# Altium PCB 本部自动化2003交通信号灯设计.PcbDoc
Units mm, origin at the board's own origin, x right, y up, seen from the top; angles counter-clockwise.
Board outline 200 x 150 mm, 2 copper layers (Top Layer, Bottom Layer); 30 components, 53 nets, 203 pads, 4 vias.
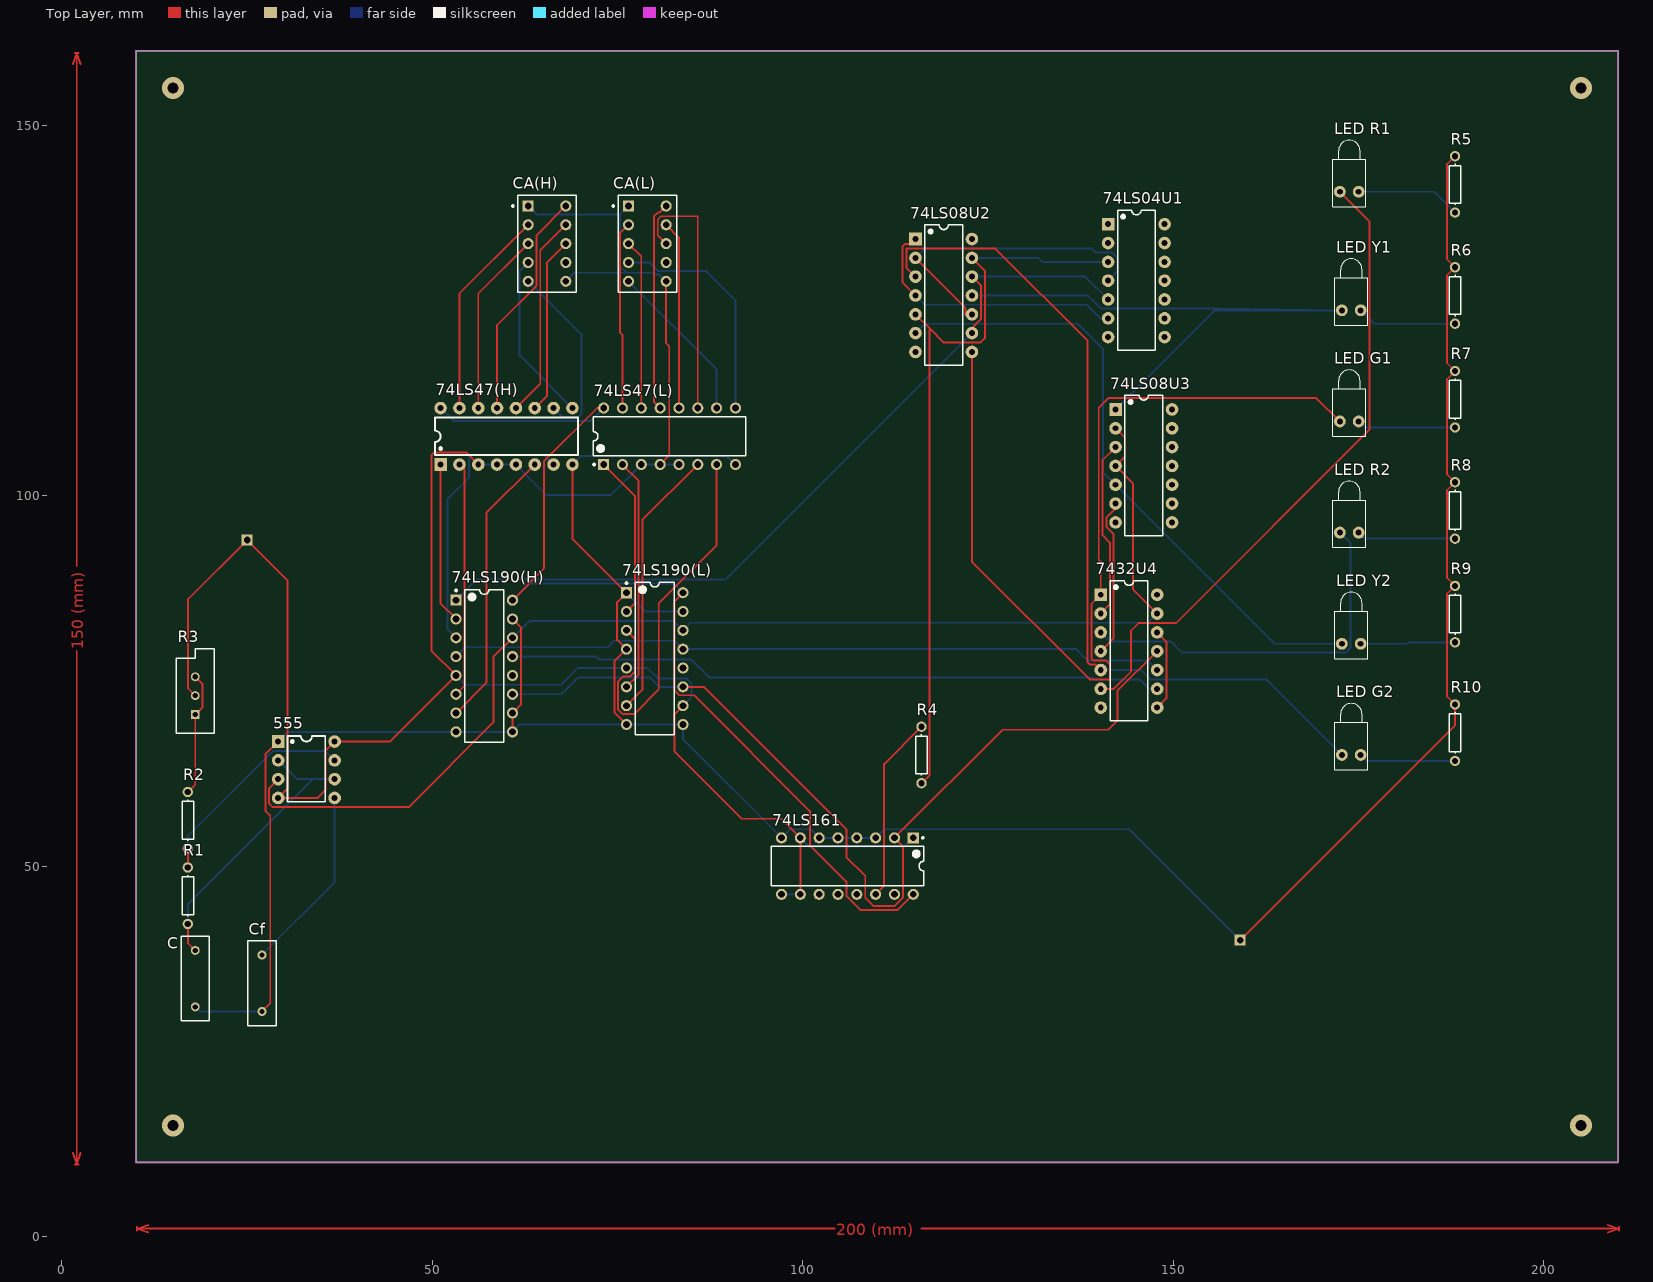
[diagram p0: Top Layer view]
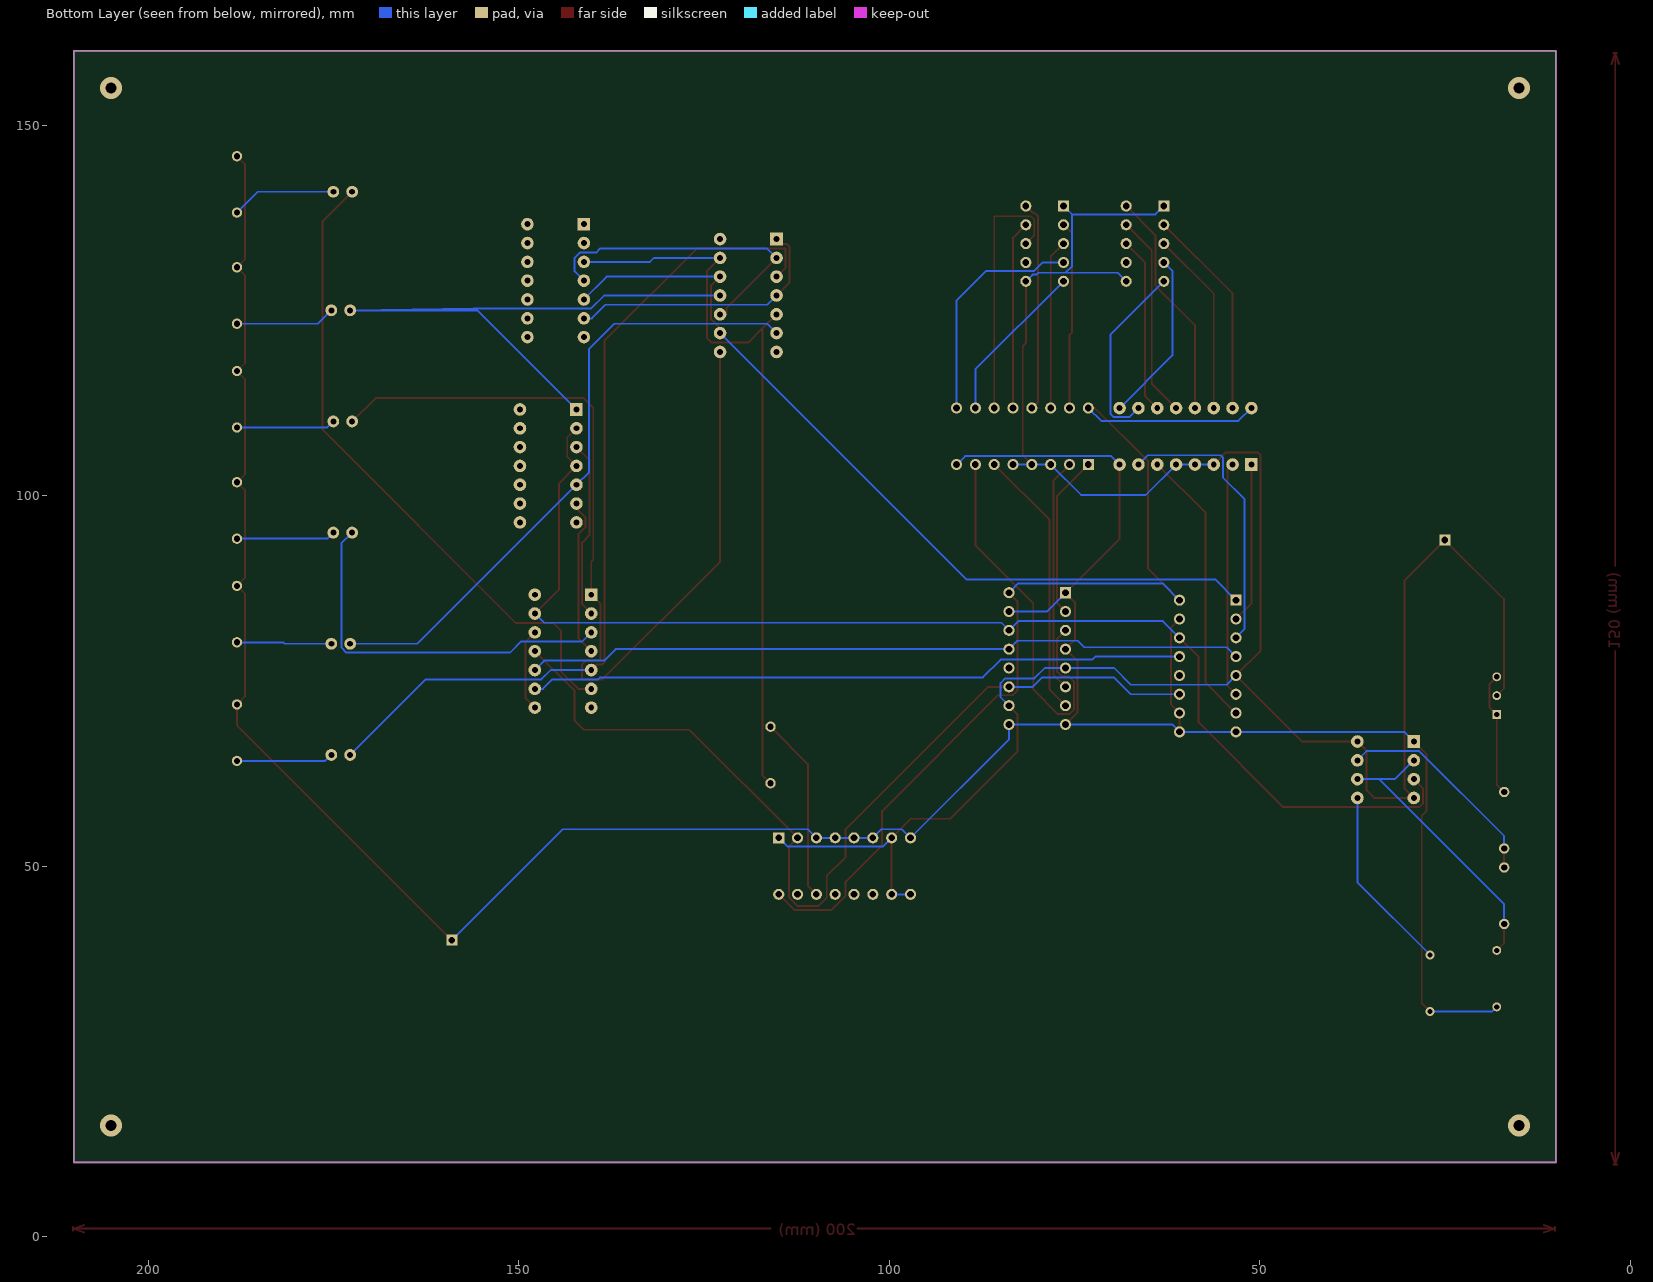
[diagram p1: Bottom Layer view, seen from below]

## Layer stack, top to bottom
Top Solder: solder mask 0.0102, Solder Resist, Dk 3.5
Top Layer: signal copper 0.0356
Dielectric 1: dielectric 0.32, FR-4, Dk 4.8
Bottom Layer: signal copper 0.0356
Bottom Solder: solder mask 0.0102, Solder Resist, Dk 3.5

## Board outline
10,10 210,10 210,160 10,160

## Design rules (kind name [scope] priority, off if disabled: settings)
Clearance [All] p1: gap=0.254 ignorepadtopadclearanceinfootprint=FALSE except(0: Arc-Hole Track-Hole SMDPad-Hole THPad-Hole Via-Hole Fill-Hole Poly-Hole Region-Hole Text-Hole)
PolygonConnect [All] p1: connectstyle=Relief reliefconductorwidth=0.254 reliefentries=4 polygonreliefangle="90 Angle" airgapwidth=0.254
RoutingVias [All] p1: holewidth=0.711 width=1.27 viastyle="Through Hole" minholewidth=0.711 minwidth=1.27 maxholewidth=0.711 maxwidth=1.27
SolderMaskExpansion [All] p1: expansion=0.102 istentingtop=FALSE
Width [All] p1: maxlimit=0.254 minlimit=0.254 preferedwidth=0.254
30 further rules are at their usual default settings.

## Components (designator, comment, footprint, x,y, rotation, side; value= is the part's Value field where it differs from the comment)
74LS04U1 "74LS04" DIP14 145,129 r0 top
74LS08U2 "74LS08" DIP14 119,127 r0 top
74LS08U3 "74LS08" DIP14 146,104 r0 top
74LS47(H) "SN7447A" DIP16 60,108 r90 top
74LS47(L) "SN7447A" DIP-16 82,108 r90 top
74LS161 "74LS161A" DIP-16 106,50 r270 top
74LS190(H) "SN74LS190" DIP-16 57,77 r0 top
74LS190(L) "SN74LS190" DIP-16 80,78 r0 top
555 "555" DIP8 33,63 r0 top
7432U4 "7432" DIP14 144,79 r0 top
C "Cap" RAD-0.3 18,34.81 r90 top value=10uF
CA(H) "Dpy Red-CA" A 65.46,134 r0 top
CA(L) "Dpy Red-CA" A 79,134 r0 top
Cf "Cap" RAD-0.3 27,34.19 r90 top value=10nF
"LED G1" "LED1" LED-1 173.73,110 r90 top
"LED G2" "LED1" LED-1 174,65 r90 top
"LED R1" "LED1" LED-1 173.73,141 r90 top
"LED R2" "LED1" LED-1 173.73,95 r90 top
"LED Y1" "LED1" LED-1 174,125 r90 top
"LED Y2" "LED1" LED-1 174,80 r90 top
R1 "Res1" AXIAL-0.3 17,46 r90 top value=51K
R2 "Res1" AXIAL-0.3 17,56.19 r90 top value=47K
R3 "RPot" VR5 18,73 r90 top value=5K
R4 "Res1" AXIAL-0.3 116,65 r90 top value=100
R5 "Res1" AXIAL-0.3 188,142 r90 top value=100
R6 "Res1" AXIAL-0.3 188,127 r90 top value=100
R7 "Res1" AXIAL-0.3 188,113 r90 top value=100
R8 "Res1" AXIAL-0.3 188,98 r90 top value=100
R9 "Res1" AXIAL-0.3 188,84 r90 top value=100
R10 "Res1" AXIAL-0.3 188,68 r90 top value=100

## Footprints (in the part's own frame and the unit in brackets; to place one, negate y for a bottom-side part, rotate by r counter-clockwise, add the part's x,y. Pads: shape width x height; smd on the part's side, far side on the other; paste and mask are expansions set on the pad)
A [mm] "LED, 7-Segment Display, 7.62 mm, RHD; 10 Leads; Row Space 5.08 mm; Pitch 2.54 mm"
  rect 1.5x1.5 hole 0.9: 1(-2.54,5.08)
  round 1.5 hole 0.9: 2(-2.54,2.54) 3(-2.54,0) 4(-2.54,-2.54) 5(-2.54,-5.08) 6(2.54,-5.08) 7(2.54,-2.54) 8(2.54,0) 9(2.54,2.54) 10(2.54,5.08)
  silkscreen extent -4.72,-6.55 3.95,6.55, body extent -3.95,-6.55 3.95,6.55, height 6.34
AXIAL-0.3 [mm] "Axial Device, Thru-Hole; 2 Leads; 0.3 in Pin Spacing"
  round 1.4 hole 0.85: 1(-3.81,0) 2(3.81,0)
  silkscreen extent -2.77,-0.76 2.77,0.76
DIP8 [mm]
  rect 1.7x1.7 hole 0.8: 1(-3.81,3.81)
  round 1.7 hole 0.8: 2(-3.81,1.27) 3(-3.81,-1.27) 4(-3.81,-3.81) 5(3.81,-3.81) 6(3.81,-1.27) 7(3.81,1.27) 8(3.81,3.81)
  silkscreen extent -2.54,-4.32 2.54,4.57, body extent -3.94,-4.7 3.91,4.7, height 4.5
DIP14 [mm]
  rect 1.7x1.7 hole 0.8: 1(-3.81,7.62)
  round 1.7 hole 0.8: 2(-3.81,5.08) 3(-3.81,2.54) 4(-3.81,0) 5(-3.81,-2.54) 6(-3.81,-5.08) 7(-3.81,-7.62) 8(3.81,-7.62) 9(3.81,-5.08) 10(3.81,-2.54) 11(3.81,0) 12(3.81,2.54) 13(3.81,5.08) 14(3.81,7.62)
  silkscreen extent -2.54,-9.4 2.54,9.53, body extent -3.98,-9.6 3.98,9.4, height 4.1
DIP16 [mm]
  rect 1.7x1.7 hole 0.8: 1(-3.81,8.89)
  round 1.7 hole 0.8: 2(-3.81,6.35) 3(-3.81,3.81) 4(-3.81,1.27) 5(-3.81,-1.27) 6(-3.81,-3.81) 7(-3.81,-6.35) 8(-3.81,-8.89) 9(3.81,-8.89) 10(3.81,-6.35) 11(3.81,-3.81) 12(3.81,-1.27) 13(3.81,1.27) 14(3.81,3.81) 15(3.81,6.35) 16(3.81,8.89)
  silkscreen extent -2.54,-9.65 2.54,9.65, body extent -4.02,-9.65 4.02,9.65, height 4.45
DIP-16 [mm] "DIP; 16 Leads; Row Spacing 7.62 mm; Pitch 2.54 mm"
  rect 1.5x1.5 hole 0.9: 1(-3.81,8.89)
  round 1.5 hole 0.9: 2(-3.81,6.35) 3(-3.81,3.81) 4(-3.81,1.27) 5(-3.81,-1.27) 6(-3.81,-3.81) 7(-3.81,-6.35) 8(-3.81,-8.89) 9(3.81,-8.89) 10(3.81,-6.35) 11(3.81,-3.81) 12(3.81,-1.27) 13(3.81,1.27) 14(3.81,3.81) 15(3.81,6.35) 16(3.81,8.89)
  silkscreen extent -3.93,-10.3 2.65,10.31, body extent -3.6,-10.28 3.6,10.28, height 5.08
LED-1 [mm] "LED; 2 Leads"
  round 1.6 hole 0.8: 1(0,1.27) 2(0,-1.27)
  silkscreen extent -2,-2.2 6.95,2.2
RAD-0.3 [mm] "Radial Cap, Thru-Hole; 2 Leads; 0.3 in Pin Spacing"
  round 1.2 hole 0.7: 1(-3.81,0) 2(3.81,0)
  silkscreen extent -5.72,-1.91 5.71,1.9
VR5 [mm] "Thru-Hole; 3 Leads"
  rect 1.2x1.2 hole 0.7: 1(-2.54,0)
  round 1.2 hole 0.7: 2(0,0) 3(2.54,0)
  silkscreen extent -5.08,-2.54 6.35,2.54

## Part data
74LS47(H) 74LS47(L): library part SN7446A, "BCD-To-SEVEN-SEGMENT DEC DRV"
74LS161: "Synchronous 4-Bit Binary Counter with Direct Clear"
74LS190(H) 74LS190(L): "SYN UP/DOWN CNT DOWN/UP MODE CONTTOL"
C Cf: "Capacitor", LatestRevisionDate=17-Jul-2002, LatestRevisionNote="Re-released for DXP Platform.", PackageDescription="Radial Cap, Thru-Hole; 2 Leads; 0.3 in Pin Spacing", PackageReference=RAD-0.3, Published=8-Jun-2000, Publisher="Altium Limited"
CA(H) CA(L): "7.62 mm Black Surface HER 7-Segment Display: CA, RH DP", Colour="High Efficiency Red (HER)", ComponentLink1Description="Manufacturer Link", ComponentLink1URL=http://www.agilent.com/, DatasheetVersion=19-Feb-2002, LatestRevisionDate=17-Dec-2003, LatestRevisionNote="Schematic revised, PCB Footprint replaced.", MinimumIntensity="360 ucd", Note="IF = 5 mA", PackageDescription="LED, 7-Segment Display, 7.62 mm, RHD; 10 Leads; Row Space 5.08 mm; Pitch 2.54 mm", PackageReference=A, PackageVersion=11-Feb-2002, Published=8-Jun-2000, Publisher="Altium Limited"
"LED G1" "LED G2" "LED R1" "LED R2" "LED Y1" "LED Y2": "Typical RED GaAs LED", LatestRevisionDate=08-Jul-2005, LatestRevisionNote="Mech Layer 1 removed.", PackageDescription="LED; 2 Leads", PackageReference=LED-1, Published=8-Jun-2000, Publisher="Altium Limited"
R1 R2 R4 R5 R6 R7 R8 R9 R10: "Resistor", LatestRevisionDate=17-Jul-2002, LatestRevisionNote="Re-released for DXP Platform.", PackageDescription="Axial Device, Thru-Hole; 2 Leads; 0.3 in Pin Spacing", PackageReference=AXIAL-0.3, Published=8-Jun-2000, Publisher="Altium Limited"
R3: "Potentiometer", LatestRevisionDate=17-Jul-2002, LatestRevisionNote="Re-released for DXP Platform.", PackageDescription="Variable Resistor, Thru-Hole; 3 Leads", PackageReference=VR5, Published=8-Jun-2000, Publisher="Altium Limited", Set Position=0.5, Sim Note="Enter the Resistance value and the set point into parameter fields."

## Free pads (board coordinates)
  rect 1.5x1.5 hole 0.9: 13(25,94) 14(159,40)

## Via types
v1: diameter 3, hole 1.5, Top Layer to Bottom Layer, 4 vias

## Nets (pads, with @x,y where several pads share a name; then routed paths per layer and width w, separated by ;. In a path a pad name is that pad's centre, name@x,y a point inside that pad or via, vN(x,y) a via of type N, cw(c..) or ccw(c..) an arc to the next point about the centre after c; other vN are vias at no path point)
+5: 74LS47(H).3 74LS47(H).4 74LS47(H).5 74LS47(L).3 74LS47(L).4 74LS47(L).5 74LS161.1 74LS161.7 74LS161.9 74LS161.10 74LS190(H).5 74LS190(L).5 74LS190(L).10 555.4 555.8 CA(H).1 CA(H).6 CA(L).1 CA(L).6 pad.13 R3.2 | length 320
  Top Layer w0.254: R3.2 17.018,73.982 17.018,86.018 pad.13 30.429,88.571 30.429,60.429 555.4 34.544,59.19 35.56,60.206 35.56,65.56 555.8 44.27,66.81 53.19,75.73 49.86,79.06 49.86,105.41 50.267,105.816 54.564,105.816 56.19,104.19 ; 80.73,104.19 81.966,105.426 81.966,120.148 81.54,120.574 81.54,128.92 ; 83.81,71.65 82.677,70.517 82.677,65.43 91.719,56.388 97.072,56.388 74LS161.7 74LS161.10
  Bottom Layer w0.254: 53.19,75.73 54.447,74.473 67.364,74.473 69.621,76.73 76.19,76.73 78.972,76.73 80.381,75.321 84.328,75.321 84.963,74.686 84.963,72.803 83.81,71.65 ; 56.19,104.19 58.73,104.19 61.27,104.19 65.384,100.076 74.076,100.076 78.19,104.19 80.73,104.19 83.27,104.19 ; 62.92,139.08 64.053,137.947 75.311,137.931 ; 68,128.92 69.153,130.073 76.2,130.073 ; 76.46,139.08 75.311,137.931 ; 81.54,128.92 80.639,129.821 80.153,129.821 79.901,130.073 76.2,130.073 ; 74LS161.9 74LS161.10 ; 74LS161.7 100.806,52.654 113.734,52.654 74LS161.1 ; 75.311,137.931 75.311,130.962 76.2,130.073
GND: 74LS47(H).8 74LS47(L).8 74LS161.3 74LS161.4 74LS161.5 74LS161.6 74LS161.8 74LS190(H).8 74LS190(H).9 74LS190(H).10 74LS190(H).15 74LS190(L).1 74LS190(L).4 74LS190(L).8 74LS190(L).9 74LS190(L).15 555.1 C.1 Cf.1 pad.14 R5.2 R6.2 R7.2 R8.2 R9.2 R10.2 | length 403.7
  Top Layer w0.254: Cf.1 28.118,31.498 28.118,56.784 27.451,57.451 27.451,65.071 555.1 ; 60.81,68.11 60.81,70.65 61.951,71.791 61.951,82.209 60.81,83.35 ; 68.89,104.19 68.89,94.19 76.19,86.89 74.93,85.63 74.93,80.53 76.19,79.27 74.551,77.631 74.551,70.749 76.19,69.11 ; pad.14 188,69 R10.2 186.919,72.891 186.919,86.729 R9.2 186.919,88.891 186.919,100.729 R8.2 186.919,102.891 186.919,115.729 R7.2 186.919,117.891 186.919,129.729 R6.2 186.919,131.891 186.919,144.729 R5.2
  Bottom Layer w0.254: C.1 18.62,30.38 Cf.1 ; 555.1 30.49,68.11 53.19,68.11 60.81,68.11 61.81,69.11 76.19,69.11 83.81,69.11 83.81,67.11 74LS161.8 98.266,54.966 101.034,54.966 74LS161.6 74LS161.5 74LS161.4 74LS161.3 110.966,54.966 144.034,54.966 pad.14 ; 68.89,104.19 70.034,105.334 89.746,105.334 90.89,104.19 ; 76.19,86.89 78.73,84.35 83.81,84.35
Net74LS04U1_3: 74LS04U1.3 74LS08U2.5 74LS08U2.13 R4.1 | length 103.2
  Top Layer w0.254: 74LS08U2.5 117.094,122.556 ; R4.1 117.094,62.284 117.094,122.556 ; 74LS08U2.13 124.562,130.328 124.562,121.26 123.952,120.65 119,120.65 117.094,122.556
  Bottom Layer w0.254: 74LS08U2.13 131.724,132.08 132.264,131.54 74LS04U1.3
Net74LS04U1_4: 74LS04U1.4 74LS08U2.2 74LS08U2.10 | length 43.2
  Top Layer w0.254: 74LS08U2.2 121.92,125.35 121.92,124.46 74LS08U2.10
  Bottom Layer w0.254: 74LS08U2.2 116.435,133.325 139.014,133.325 139.548,132.791 141.732,132.791 142.443,132.08 142.443,130.253 74LS04U1.4
Net74LS04U1_5: 74LS04U1.5 74LS08U2.9 74LS08U2.12 74LS190(H).1 | length 112.8
  Top Layer w0.254: 74LS08U2.9 122.965,122.784 124.054,123.872 124.054,128.296 74LS08U2.12
  Bottom Layer w0.254: 53.19,85.89 55.997,88.697 89.587,88.697 74LS08U2.9 ; 74LS08U2.12 138.11,129.54 74LS04U1.5
Net74LS04U1_6: 74LS04U1.6 74LS08U2.1 74LS08U2.4 | length 36.8
  Top Layer w0.254: 74LS08U2.4 113.451,128.739 113.451,133.631 113.792,133.972 114.542,133.972 74LS08U2.1
  Bottom Layer w0.254: 74LS08U2.4 116.435,125.755 138.271,125.755 140.106,123.92 74LS04U1.6
Net74LS08U2_3: 74LS08U2.3 7432U4.5 "LED G2.1" | length 116.8
  Top Layer w0.254: 74LS08U2.3 113.959,130.771 113.959,133.299 113.984,133.325 125.984,133.325 138.415,120.894 138.415,77.494 138.684,77.225 139.425,77.225 7432U4.5
  Bottom Layer w0.254: 7432U4.5 145.638,76.46 146.914,75.184 162.546,75.184 172.73,65
Net74LS08U2_6: 74LS08U2.6 74LS08U3.5 "LED Y2.1" | length 85.7
  Bottom Layer w0.254: 74LS08U2.6 116.46,123.19 137.109,123.19 140.487,119.812 140.487,103.163 74LS08U3.5 163.65,80 172.73,80
Net74LS08U2_8: 74LS08U2.8 7432U4.1 "LED G1.1" | length 127.2
  Top Layer w0.254: 74LS08U2.8 122.81,91.07 138.69,75.19 141.382,75.19 141.427,75.235 141.427,77.216 140.894,77.749 139.192,77.749 138.938,78.003 138.938,85.368 7432U4.1 140.19,91.077 139.929,91.338 139.929,111.862 141.224,113.157 169.303,113.157 172.46,110
Net74LS08U2_11: 74LS08U2.11 74LS08U3.1 "LED Y1.1" | length 86.7
  Bottom Layer w0.254: 74LS08U2.11 138.455,127 140.233,125.222 156.058,125.222 172.73,125 155.57,125 74LS08U3.1
Net74LS08U3_2: 74LS08U3.2 74LS08U3.4 74LS190(H).14 74LS190(L).14 555.3 7432U4.13 | length 169.3
  Top Layer w0.254: 555.3 27.959,60.499 27.959,58.42 28.42,57.959 46.808,57.959 58.242,69.393 58.242,78.242 60.81,80.81 ; 74LS08U3.2 143.434,107.836 143.434,105.244 74LS08U3.4 144.526,101.664 144.526,87.364 7432U4.13
  Bottom Layer w0.254: 60.81,80.81 63.058,83.058 82.562,83.058 83.81,81.81 84.829,82.829 146.559,82.829 7432U4.13
Net74LS08U3_3: 74LS08U3.3 7432U4.2 | length 24.1
  Top Layer w0.254: 7432U4.2 141.427,85.317 141.427,93.665 140.451,94.641 140.451,104.801 74LS08U3.3
Net74LS08U3_6: 74LS08U3.6 7432U4.4 | length 21.5
  Top Layer w0.254: 7432U4.4 141.935,80.745 141.935,94.793 140.959,95.769 140.959,97.028 141.975,98.044 74LS08U3.6
Net74LS47(H)_1: 74LS47(H).1 74LS190(H).2 | length 21.7
  Top Layer w0.254: 51.11,104.19 51.11,85.43 53.19,83.35
Net74LS47(H)_2: 74LS47(H).2 74LS190(H).6 | length 31.8
  Top Layer w0.254: 53.19,73.19 54.331,74.331 54.331,103.509 53.65,104.19
Net74LS47(H)_6: 74LS47(H).6 74LS190(H).7 | length 37.9
  Top Layer w0.254: 53.19,70.65 57.277,74.737 57.277,97.657 63.81,104.19
Net74LS47(H)_7: 74LS47(H).7 74LS190(H).3 | length 38.1
  Bottom Layer w0.254: 53.19,80.81 52.045,81.955 52.045,99.543 54.94,102.438 54.94,105.156 55.22,105.435 65.105,105.435 66.35,104.19
Net74LS47(H)_9: 74LS47(H).9 CA(H).4 | length 23.1
  Bottom Layer w0.254: 62.92,131.46 61.773,130.313 61.773,118.927 68.89,111.81
Net74LS47(H)_10: 74LS47(H).10 CA(H).5 | length 25.3
  Bottom Layer w0.254: 62.92,128.92 70.129,121.711 70.129,111.049 69.66,110.579 67.581,110.579 66.35,111.81
Net74LS47(H)_11: 74LS47(H).11 CA(H).8 | length 23.9
  Top Layer w0.254: 63.81,111.81 65.481,113.481 65.481,131.481 68,134
Net74LS47(H)_12: 74LS47(H).12 CA(H).9 | length 27.5
  Top Layer w0.254: 61.27,111.81 64.559,115.099 64.559,133.099 68,136.54
Net74LS47(H)_13: 74LS47(H).13 CA(H).10 | length 31.1
  Top Layer w0.254: 58.73,111.81 58.73,123.019 64.051,128.34 64.051,135.131 68,139.08
Net74LS47(H)_14: 74LS47(H).14 CA(H).3 | length 25
  Top Layer w0.254: 56.19,111.81 56.19,127.27 62.92,134
Net74LS47(H)_15: 74LS47(H).15 CA(H).2 | length 28.6
  Top Layer w0.254: 53.65,111.81 53.65,127.27 62.92,136.54
Net74LS47(L)_1: 74LS47(L).1 74LS190(L).2 | length 22.1
  Top Layer w0.254: 73.11,104.19 77.321,99.979 77.321,85.481 76.19,84.35
Net74LS47(L)_2: 74LS47(L).2 74LS190(L).6 | length 31.6
  Top Layer w0.254: 75.65,104.19 77.829,102.011 77.829,75.829 76.19,74.19
Net74LS47(L)_6: 74LS47(L).6 74LS190(L).7 | length 36.5
  Top Layer w0.254: 76.19,71.65 78.337,73.797 78.337,96.717 85.81,104.19
Net74LS47(L)_7: 74LS47(L).7 74LS190(L).3 | length 53.4
  Top Layer w0.254: 76.19,81.81 77.321,80.679 77.321,76.2 76.72,75.599 75.726,75.599 75.059,74.932 75.059,71.12 75.66,70.519 77.216,70.519 80.543,73.846 80.543,85.471 88.35,93.278 88.35,104.19
Net74LS47(L)_9: 74LS47(L).9 CA(L).4 | length 31.1
  Bottom Layer w0.254: 76.46,131.46 79.285,131.46 80.416,130.329 86.917,130.329 90.89,126.356 90.89,111.81
Net74LS47(L)_10: 74LS47(L).10 CA(L).5 | length 22
  Bottom Layer w0.254: 76.46,128.92 88.35,117.03 88.35,111.81
Net74LS47(L)_11: 74LS47(L).11 CA(L).8 | length 35.2
  Top Layer w0.254: 81.54,134 80.409,135.131 80.409,137.254 80.848,137.693 85.801,137.693 85.81,137.685 85.81,111.81
Net74LS47(L)_12: 74LS47(L).12 CA(L).9 | length 25.4
  Top Layer w0.254: 81.54,136.54 83.27,134.81 83.27,111.81
Net74LS47(L)_13: 74LS47(L).13 CA(L).10 | length 28.4
  Top Layer w0.254: 80.73,111.81 79.901,112.639 79.901,137.668 80.412,138.179 80.639,138.179 81.54,139.08
Net74LS47(L)_14: 74LS47(L).14 CA(L).3 | length 22.9
  Top Layer w0.254: 76.46,134 78.19,132.27 78.19,111.81
Net74LS47(L)_15: 74LS47(L).15 CA(L).2 | length 25.3
  Top Layer w0.254: 75.65,111.81 75.65,121.708 75.311,122.047 75.311,135.391 76.46,136.54
Net74LS161_2: 74LS161.2 74LS190(H).11 74LS190(L).11 7432U4.11 | length 127.5
  Top Layer w0.254: 83.81,74.19 86.617,74.19 105.867,54.94 105.867,51.206 108.407,48.666 108.407,45.72 109.499,44.628 112.395,44.628 113.487,45.72 113.487,52.673 74LS161.2 126.942,68.402 141.224,68.402 142.443,69.621 142.443,73.633 7432U4.11
  Bottom Layer w0.254: 60.81,73.19 67.361,73.19 69.609,75.438 79.375,75.438 80.623,74.19 83.81,74.19
Net74LS161_14: 74LS161.14 R4.2 | length 25.2
  Top Layer w0.254: 74LS161.14 110.947,47.327 110.947,63.757 R4.2
Net74LS190(H)_4: 74LS190(H).4 74LS190(L).13 7432U4.10 | length 97.1
  Bottom Layer w0.254: 53.19,78.27 54.447,79.527 73.663,79.527 74.536,80.401 82.679,80.401 83.81,79.27 136.909,79.27 138.455,77.724 146.546,77.724 7432U4.10
Net74LS190(H)_13: 74LS190(H).13 7432U4.9 | length 88.8
  Bottom Layer w0.254: 60.81,78.27 72.174,78.27 72.583,77.861 84.941,77.861 87.339,75.463 138.963,75.463 139.243,75.184 145.456,75.184 146.72,73.92 7432U4.9
Net555_2: 555.2 555.6 C.2 R1.1 | length 39.2
  Top Layer w0.254: R1.1 17,39.62 C.2
  Bottom Layer w0.254: R1.1 17,44.846 33.884,61.73 ; 555.2 31.73,61.73 33.884,61.73 ; 555.6 33.884,61.73
Net555_5: 555.5 Cf.2 | length 25.3
  Bottom Layer w0.254: Cf.2 36.81,47.81 555.5
Net555_7: 555.7 R1.2 R2.1 | length 29.3
  Top Layer w0.254: R1.2 R2.1
  Bottom Layer w0.254: R2.1 17,54.059 28.448,65.507 35.573,65.507 555.7
Net7432U4_3: 7432U4.3 "LED R2.1" | length 51.2
  Bottom Layer w0.254: 7432U4.3 141.441,80.289 149.682,80.289 151.155,78.816 173.228,78.816 173.914,79.502 173.914,93.546 172.46,95
Net7432U4_6: 7432U4.6 "LED R1.1" | length 87.8
  Top Layer w0.254: 7432U4.6 141.935,73.92 144.272,76.257 144.272,81.788 145.288,82.804 150.368,82.804 176.454,108.89 176.454,137.006 172.46,141
Net7432U4_8: 7432U4.8 7432U4.12 | length 11.2
  Top Layer w0.254: 7432U4.8 149.047,72.617 149.047,80.303 7432U4.12
"NetLED G1_2": "LED G1.2" R7.1 | length 13.3
  Bottom Layer w0.254: 175,110 175.81,109.19 R7.1
"NetLED G2_2": "LED G2.2" R10.1 | length 13.1
  Bottom Layer w0.254: 175.27,65 176.08,64.19 R10.1
"NetLED R1_2": "LED R1.2" R5.1 | length 14.2
  Bottom Layer w0.254: 175,141 185.19,141 R5.1
"NetLED R2_2": "LED R2.2" R8.1 | length 13.3
  Bottom Layer w0.254: 175,95 175.81,94.19 R8.1
"NetLED Y1_2": "LED Y1.2" R6.1 | length 13.5
  Bottom Layer w0.254: 175.27,125 177.08,123.19 R6.1
"NetLED Y2_2": "LED Y2.2" R9.1 | length 12.8
  Bottom Layer w0.254: 175.27,80 181.534,80 181.724,80.19 R9.1
NetR2_2: R2.2 R3.1 R3.3 | length 16.8
  Top Layer w0.254: R2.2 18,61 R3.1 18.999,71.459 18.999,74.541 R3.3
VCC: 74LS47(H).16 74LS47(L).16 74LS161.16 74LS190(H).16 74LS190(L).16 | length 142.3
  Top Layer w0.254: 60.81,85.89 65.049,90.129 65.049,104.648 72.211,111.81 73.11,111.81 ; 83.81,86.89 82.677,85.757 82.677,73.66 83.287,73.05 85.319,73.05 100.94,57.429 100.94,52.832 105.867,47.904 105.867,45.974 107.747,44.094 112.794,44.094 74LS161.16
  Bottom Layer w0.254: 51.11,111.81 52.849,110.071 71.371,110.071 73.11,111.81 ; 60.81,85.89 63.058,88.138 82.562,88.138 83.81,86.89
pads on no net: 74LS04U1.1 74LS04U1.2 74LS04U1.7 74LS04U1.8 74LS04U1.9 74LS04U1.10 74LS04U1.11 74LS04U1.12 74LS04U1.13 74LS04U1.14 74LS08U2.7 74LS08U2.14 74LS08U3.7 74LS08U3.8 74LS08U3.9 74LS08U3.10 74LS08U3.11 74LS08U3.12 74LS08U3.13 74LS08U3.14 74LS161.11 74LS161.12 74LS161.13 74LS161.15 74LS190(H).12 74LS190(L).12 7432U4.7 7432U4.14 CA(H).7 CA(L).7
copper on no net: | length 341.7
  Top Layer w0.254: 1.492,11.263 2,9.739 ; 1.492,158.215 2,159.739 ; 1.746,9.739 2.254,9.739 ; 1.746,159.739 2.254,159.739 ; 2,79 2,9.739 ; 2,90.477 2,159.739 ; 2.508,11.263 2,9.739 ; 2.508,158.215 2,159.739 ; 10.134,0.813 10.134,1.321 ; 11.658,0.559 10.134,1.067 ; 11.658,1.575 10.134,1.067 ; 104.269,1.067 10.134,1.067 ; 116,1.067 210.134,1.067 ; 208.61,0.559 210.134,1.067 ; 208.61,1.575 210.134,1.067 ; 210.134,0.813 210.134,1.321
  other v1: 15,15 205,15 15,155 205,155

## Keep-outs
Keep-Out Layer:
  the board outline again, w0.254

## Other copper
Top Layer:
  text "150 (mm)" at 2.914,79.254 h1.52 r90
  text "200 (mm)" at 104.523,0.152 h1.52